# EAGLE board Boost (EAGLE 7.7.0)
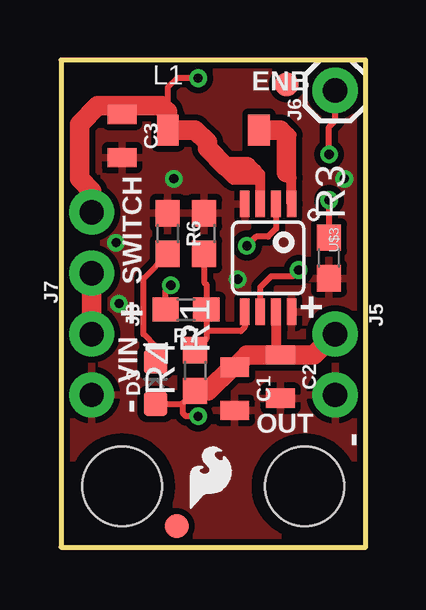
[diagram p0: board, top side]
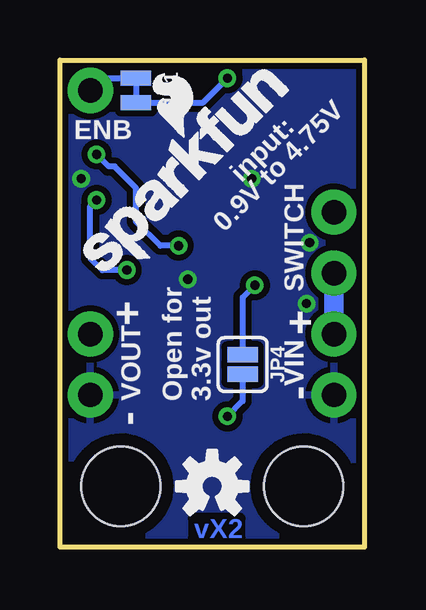
[diagram p1: board, bottom side, seen from below]

Size 12.7 x 20.32 mm. Coordinates in mm from the lower left corner, seen from the top.
Outline: 0,0 12.7,0 12.7,20.32 0,20.32 0,0
Copper layers (1*16): Top 0.035mm / dielectric 1.5mm / Bottom 0.035mm
Design rules "SparkFun-2-layer-TIGHT": minimum track width 7mil, minimum drill 15mil, track to track 7mil, track to pad 7mil, pad to pad 7mil, via to via 7mil, smd to smd 7mil, copper to edge 7mil, drill to drill 7mil, minimum pad ring 7mil, minimum via ring 7mil, stop-mask expansion 4mil, vias tented up to drill 25mil, thermal gap 10mil
Net classes: 0 default: width 0.152 mm, drill 0.305 mm, clearance 0.152 mm

## Footprints (pad centres in the part's own frame; a part is rotated, then mirrored left to right if it is on the bottom)
0805 = smd 0.8 x 1.2: 1 -0.9,0; 2 0.9,0
LED-0603 = smd 1 x 1: A -0.877,0; C 0.877,0
1X02_NO_SILK = drill 1.016 pad 1.88: 1 0,0; 2 2.54,0
1X01 = drill 1.016 pad 1.88: 1 0,0
SMT-JUMPER_2_NC_TRACE_NO-SILK = smd 0.635 x 1.27: 1 -0.508,0; 2 0.508,0
FIDUCIAL-1X2 = smd 1 x 1: 1 0,0
SMT-JUMPER_2_NO_SILK = smd 0.635 x 1.27: 1 -0.406,0; 2 0.406,0
STAND-OFF = hole 3.302: 0,0
INDUCTOR_2.2UHCOPY = smd 0.9 x 1.3: P$1 -1.9,0; P$2 1.9,0
0603 = smd 1.1 x 1: 1 -0.85,0; 2 0.85,0
SPARKFUN-POWERIC_MSOP8 = smd 0.4 x 1.1: 1 -0.975,-2.25; 2 -0.325,-2.25; 3 0.325,-2.25; 4 0.975,-2.25; 5 0.975,2.25; 6 0.325,2.25; 7 -0.325,2.25; 8 -0.975,2.25

## Placement (x,y rotation side)
C1  22uF  [0805]  7.24,6.6 270 top
C2  22uF  [0805]  9.14,7.11 270 top
C3  22uF  [0805]  2.54,17.14 270 top
D3  RED  [LED-0603]  3.94,6.86 90 top
FRAME1  FRAME-LETTER  [CREATIVE_COMMONS]  -24.43,-24.45 0 top  (outside the outline)
J3  PTH  [1X02_NO_SILK]  1.27,8.89 270 top
J5  [1X02_NO_SILK]  11.43,8.89 270 top
J6  [1X01]  11.43,19.05 90 top
J7  PTH  [1X02_NO_SILK]  1.27,11.43 90 top
JP1  NC  [SMT-JUMPER_2_NC_TRACE_NO-SILK]  9.53,19.05 270 bottom
JP2  FIDUCIAL1X2  [FIDUCIAL-1X2]  4.83,0.89 0 top
JP3  SFE_LOGO_NAME_FLAME.1_INCH  [SFE_LOGO_NAME_FLAME_.1]  10.52,10.39 45 bottom
JP4  JUMPER-SMT_2_NO_SILK  [SMT-JUMPER_2_NO_SILK]  5.08,7.62 270 bottom
JP6  STAND-OFF  [STAND-OFF]  2.54,2.54 0 top
JP7  STAND-OFF  [STAND-OFF]  10.16,2.54 0 top
JP16  FIDUCIAL1X2  [FIDUCIAL-1X2]  9.4,19.3 0 top
L1  2.2µH/±20%/1.5A  [INDUCTOR_2.2UHCOPY]  6.35,17.4 0 top
LOGO1  SFE_LOGO_FLAME.1_INCH  [SFE_LOGO_FLAME_.1]  5.08,1.27 0 top
R1  100k  [0603]  5.97,13.08 270 top
R3  DNP  [0603]  11.18,12.06 90 top
R4  750K  [0603]  5.59,7.37 270 top
R6  4.7k  [0603]  4.45,13.08 270 top
R7  1.125M  [0603]  5.21,9.91 180 top
U$1  OSHW-LOGOS  [OSHW-LOGO-S]  6.35,2.54 0 bottom
U$3  SPARKFUN-POWERIC_PAM2401  [SPARKFUN-POWERIC_MSOP8]  8.64,12.06 180 top

## Library data of the parts
C1-C3 = SparkFun-Capacitors; PROD_ID: CAP-08402
D3 = SparkFun-LED; PROD_ID: DIO-00819
FRAME1 JP2 JP3 JP16 LOGO1 = SparkFun-Aesthetics
J3 J5-J7 = SparkFun-Connectors
JP1 JP4 = SparkFun-Jumpers
JP6 JP7 U$1 = SparkFun
L1 = DuplicatedCoils; PROD_ID: NDUC-09513
R1 = SparkFun-Resistors; PROD_ID: RES-07828
R3 = SparkFun-Resistors; PROD_ID: RES-07828; VALUE: 100k
R4 = SparkFun-Resistors; PROD_ID: RES-07824; VALUE: 750
R6 = SparkFun-Resistors; PROD_ID: RES-07857
R7 = SparkFun-Resistors; PROD_ID: RES-07824
U$3 = Apo Board 2017 ATmega328SMD_PAM2401

## Nets
EN: J6.1 JP1.1 U$3.2
GND: C1.2 C2.2 C3.2 J3.2 J5.2 R1.1 R3.1 R6.1 U$3.4 U$3.8
N$1: JP4.1 R7.2
N$2: D3.C R6.2
N$4: L1.P$2 U$3.1
N$6: R3.2 U$3.6
N$9: J3.1 J7.1
N$12: R1.2 R4.1 R7.1 U$3.5
VBATT: C3.1 J7.2 JP1.2 L1.P$1 U$3.3
VCC: C1.1 C2.1 D3.A J5.1 JP4.2 R4.2 U$3.7

## Tracks (layer width: path | path; a pad name or v marks a point on that pad's centre or on a via)
EN  (via drill 0.38)
  Top 0.254: U$3.2 8.96,13.28 8.64,12.95 8.13,12.95 v7.75,12.57 | v11.18,16.38 11.18,17.53 11.43,17.78 J6.1
  Bottom 0.254: v7.75,12.57 8.51,12.57 9.53,13.59 9.53,14.99 10.41,15.88 10.67,15.88 v11.18,16.38 | J6.1 10.92,19.56 JP1.1
GND  (via drill 0.38)
  other vias: 4.7,15.37 2.29,12.7 2.41,10.16 7.37,11.18 11.81,15.37
  pour Top (isolate 0.254): 0,20.32 12.7,20.32 12.7,0 0,0
  pour Bottom (isolate 0.254): 0,20.32 12.7,20.32 12.7,0 0,0
N$1  (via drill 0.38)
  Top 0.254: R7.2 4.36,10.71 v4.57,10.92
  Bottom 0.254: v4.57,10.92 5.08,10.41 JP4.1
N$2
  Top 0.254: D3.C 3.94,8.38 3.43,8.89 3.43,11.21 R6.2
N$4
  Top 0.406: U$3.1 9.61,15.41 | 9.61,15.41 9.4,15.62 | 9.61,15.41 9.61,17.19 9.53,17.27
  Top 0.813: L1.P$2 9.14,17.4 9.4,17.14 9.4,15.62
N$6  (via drill 0.38)
  Top 0.254: U$3.6 8.31,10.85 8.76,11.3 9.65,11.3 v9.91,11.56 | v11.18,14.48 R3.2
  Bottom 0.254: v9.91,11.56 10.92,11.56 11.43,12.06 11.43,14.22 v11.18,14.48
N$9
  Top 0.813: J7.1 J3.1
  Bottom 0.813: J3.1 J7.1
N$12
  Top 0.254: 6.06,9.02 R7.1 6.06,10.96 5.97,11.05 R1.2 | 6.06,9.02 6.06,8.69 R4.1 | U$3.5 7.66,9.19 7.49,9.02 6.06,9.02
VBATT  (via drill 0.38)
  Top 0.254: v5.71,19.56 4.83,19.56 4.45,19.18 4.45,18.16 L1.P$1 | 2.54,18.29 2.54,18.41
  Top 0.406: U$3.3 8.31,15.31 | 8.31,15.31 8,15.62 | 8.31,15.31 8.31,15.56 7.87,16 | 8.31,15.31 7.17,15.31 6.73,15.75
  Top 0.813: L1.P$1 5.59,17.4 6.1,16.89 6.1,16.64 6.86,15.88 7.75,15.88 8,15.62 | J7.2 1.27,14.86 0.76,15.37 0.76,17.65 1.52,18.41 2.54,18.41 4.19,18.41 4.45,18.16 L1.P$1 | C3.1 2.54,18.29
  Bottom 0.254: JP1.2 6.73,18.54 v5.71,19.56
VCC  (via drill 0.38)
  Top 0.254: D3.A 5.05,5.98 | 5.05,5.98 R4.2 | v5.71,5.46 5.21,5.46 5.08,5.59 5.08,5.95 5.05,5.98
  Top 0.406: U$3.7 8.96,8.2 C2.1
  Top 0.813: J5.1 10.55,8.01 C2.1 7.75,8.01 C1.1 7.12,7.5 6.13,6.52 R4.2
  Bottom 0.254: JP4.2 5.08,6.1 v5.71,5.46

## Text on the board
Bottom: vX2
tPlace: ENB | SWITCH | + | + | VIN | - | OUT | -
bPlace: ENB | input: / 0.9V to 4.75V | SWITCH | + | + | VOUT | + | - | VIN | VIN | Open for / 3.3v out | -
Measures: Units: Inches
tDocu: Aaron Weiss, Patrick Alberts, Toni Klopfenstein | Marshall Taylor